# Altium PCB TERMOMETRO-Martinez.PcbDoc
Units mm, origin at the board's own origin, x right, y up, seen from the top; angles counter-clockwise.
Board outline 45 x 70 mm, 2 copper layers (Top Layer, Bottom Layer); 21 components, 17 nets, 61 pads, 0 vias.
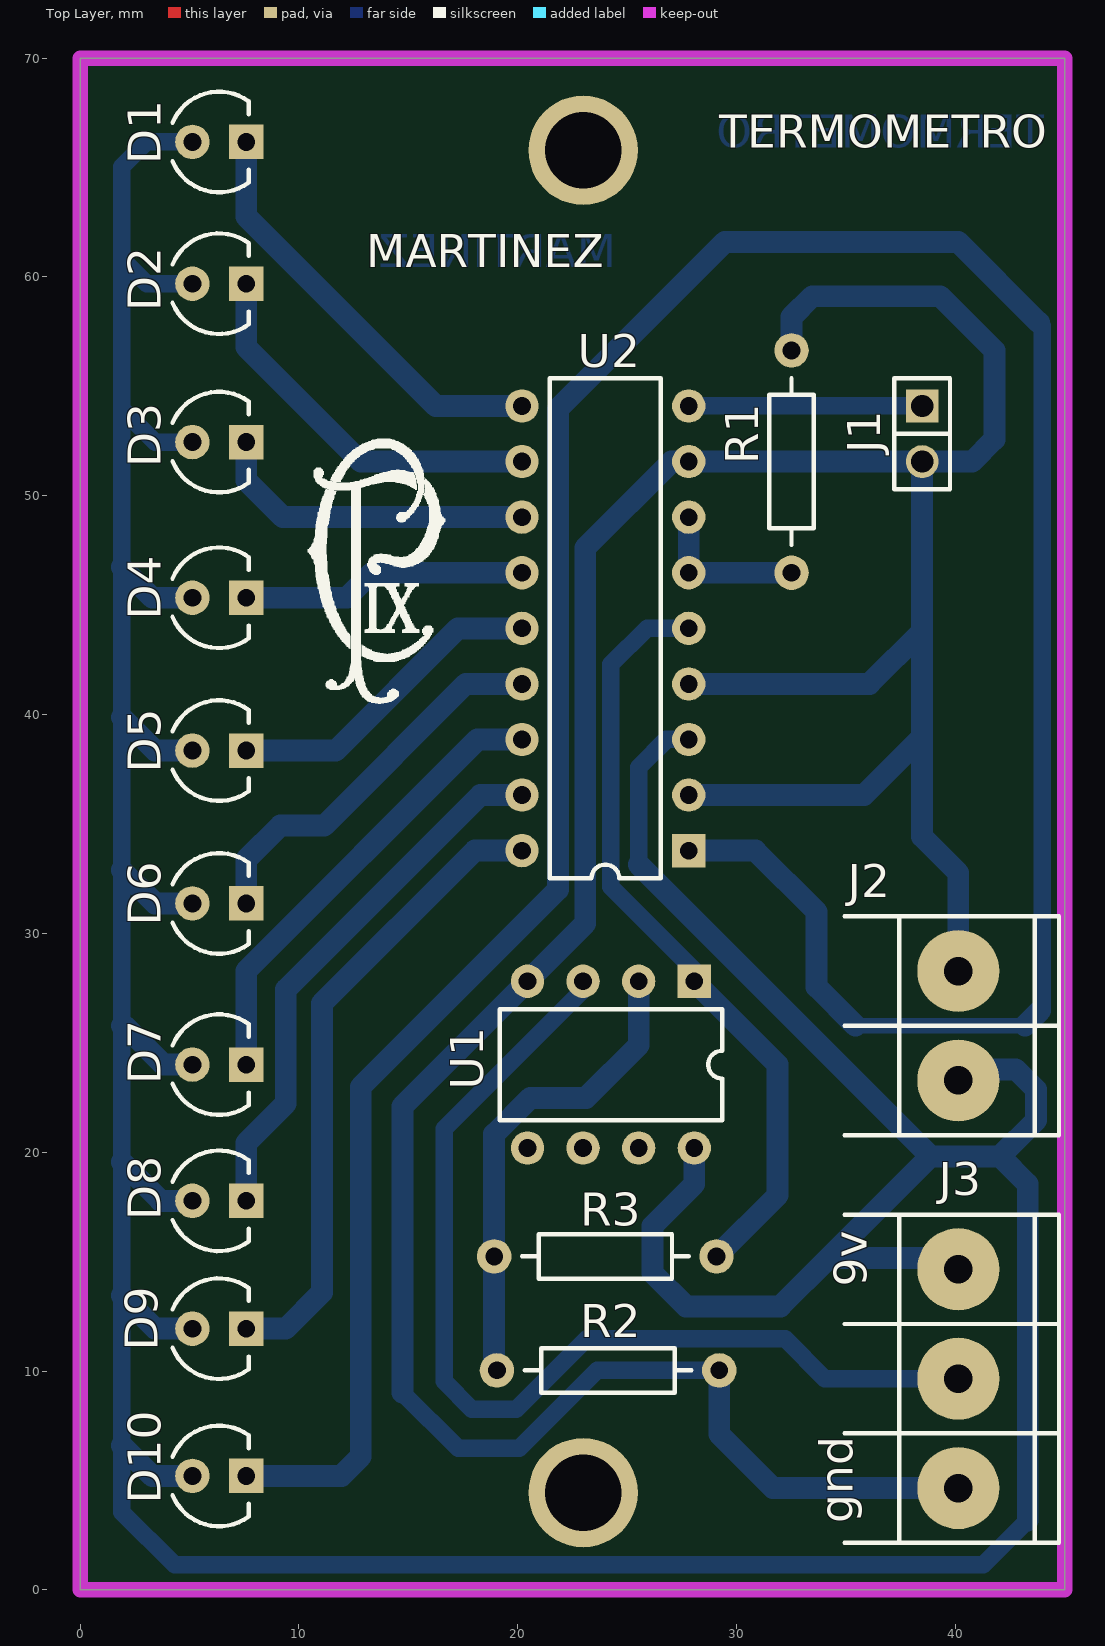
[diagram p0: Top Layer view]
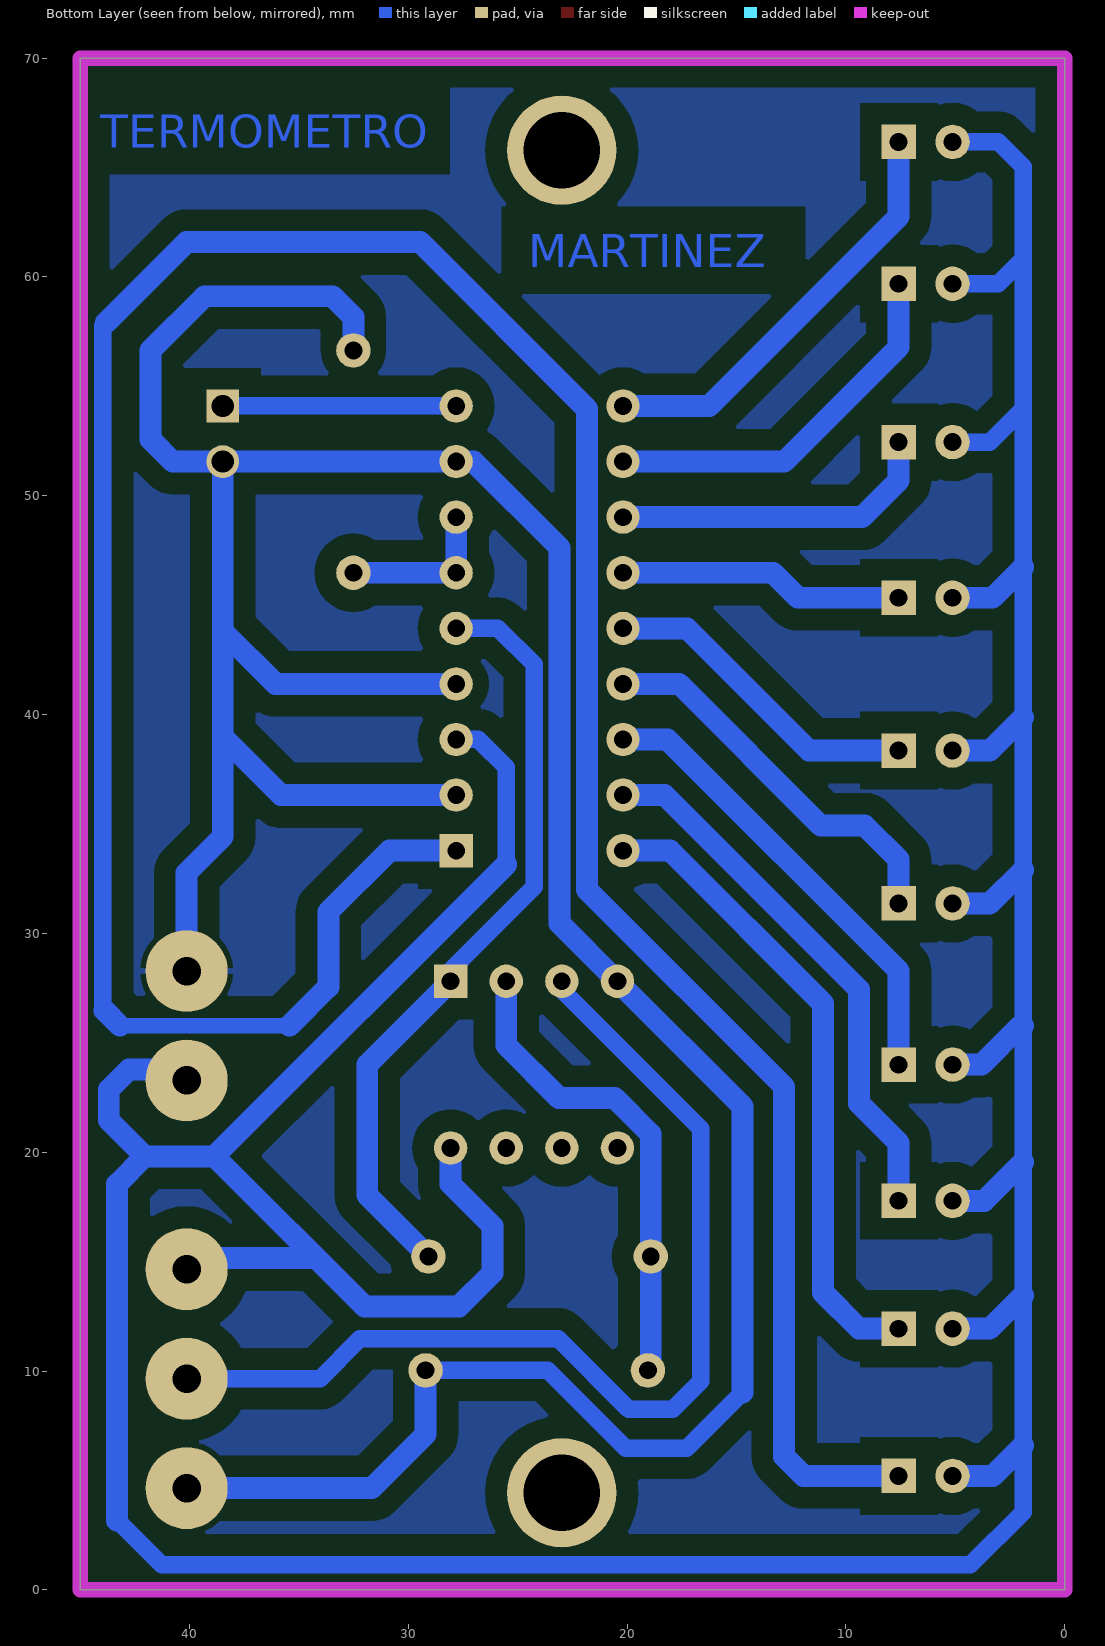
[diagram p1: Bottom Layer view, seen from below]
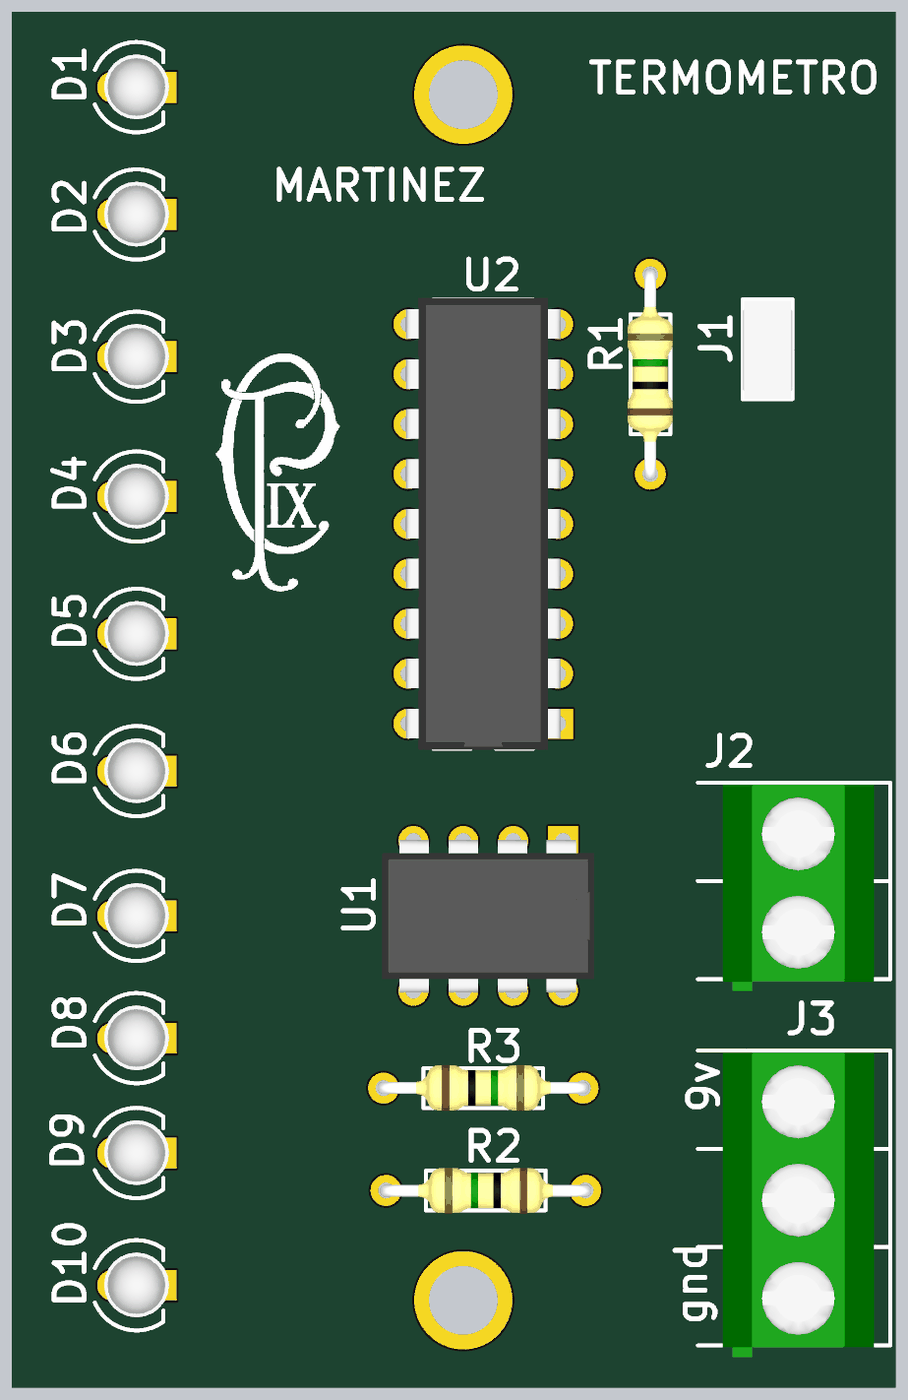
[diagram p2: 3D render of the assembled board from above, using the file's embedded part models]

## Layer stack, top to bottom
Top Solder: solder mask 0.0102, Solder Resist, Dk 3.5
Top Layer: signal copper 0.0356
Dielectric 1: dielectric 0.32, FR-4, Dk 4.8
Bottom Layer: signal copper 0.0356
Bottom Solder: solder mask 0.0102, Solder Resist, Dk 3.5

## Board outline
0,0 0,70 45,70 45,0

## Design rules (kind name [scope] priority, off if disabled: settings)
Clearance "Copper Pour" [InNamedPolygon('Polygon1')] p1: gap=1
Clearance [All] p2: gap=0.254
PolygonConnect [All] p1: connectstyle=Relief reliefconductorwidth=0.254 reliefentries=4 polygonreliefangle="90 Angle" airgapwidth=0.254
RoutingVias [All] p1: holewidth=0.711 width=1.27 viastyle="Through Hole" minholewidth=0.711 minwidth=1.27 maxholewidth=0.711 maxwidth=1.27
SolderMaskExpansion [All] p1: expansion=0.102
Width [All] p1: maxlimit=1 minlimit=0.254 preferedwidth=1 toplayer_maxwidth=0.254 toplayer_prefwidth=0.254 bottomlayer_minwidth=0.7 minimp=50.000000 maximp=50.000000 favimp=50.000000
30 further rules are at their usual default settings.

## Classes and differential pairs
component class TERMOMETRO-3A-SALERNO: D1 D2 D3 D4 D5 D6 D7 D8 D9 D10 J2 R1 R2 R3

## Components (designator, comment, footprint, x,y, rotation, side; value= is the part's Value field where it differs from the comment)
D1 "" LED3 6.35,66.167 r0 top
D2 "" LED3 6.35,59.69 r0 top
D3 "" LED3 6.35,52.451 r0 top
D4 "" LED3 6.35,45.339 r0 top
D5 "" LED3 6.35,38.354 r0 top
D6 "" LED3 6.35,31.369 r0 top
D7 "" LED3 6.35,24.003 r0 top
D8 "" LED3 6.35,17.78 r0 top
D9 "" LED3 6.35,11.938 r0 top
D10 "" LED3 6.35,5.207 r0 top
J1 "" JUMPER2 38.481,52.832 r270 top
J2 "" BORNERA2 40.132,25.781 r180 top
R1 "6.8K" RES400 32.512,46.482 r90 top
R2 "10K" RES400 29.21,10.033 r180 top
R3 "22K" RES400 18.923,15.24 r0 top
"SUJECION ?" "SUJECION" "SUJECION (5.00MM - 3.50MM)" 22.987,65.786 r90 top
"SUJECION ?" "SUJECION" "SUJECION (5.00MM - 3.50MM)" 22.987,4.445 r90 top
U1 "LM358" DIP8 28.067,27.813 r270 top
U2 "IC_DIP18" DIP18 27.813,33.782 r180 top (schematic designator U?)
? "LOGO" "LOGO SILK" 14.097,46.99 r0 top
? "BORNERA 3" BORNERA3 40.132,9.652 r180 top

## Footprints (in the part's own frame and the unit in brackets; to place one, negate y for a bottom-side part, rotate by r counter-clockwise, add the part's x,y. Pads: shape width x height; smd on the part's side, far side on the other; paste and mask are expansions set on the pad)
BORNERA2 [mm] "Bornera con Tornillos 5mm separación"
  round 3.75 hole 1.3: 1(0,2.5) 2(0,-2.5)
  silkscreen extent -4.6,-5 5.2,5, body extent -3.76,-4.89 3.94,5.61, height 10
BORNERA3 [mm] "Bornera con Tornillos 5mm separación"
  round 3.75 hole 1.3: 1(0,5) 2(0,0) 3(0,-5)
  silkscreen extent -4.6,-7.5 5.2,7.5, body extent -3.76,-7.39 3.94,8.11, height 10.05
DIP8 [mil]
  rect 60x60 hole 32: 1(0,0)
  round 60 hole 32: 2(0,-100) 3(0,-200) 4(0,-300) 5(300,-300) 6(300,-200) 7(300,-100) 8(300,0)
  silkscreen extent 50,-350 250,50, body extent -3,-363 303,63, height 177
DIP18 [mil]
  rect 60x60 hole 32: 1(0,0)
  round 60 hole 32: 2(0,-100) 3(0,-200) 4(0,-300) 5(0,-400) 6(0,-500) 7(0,-600) 8(0,-700) 9(0,-800) 10(300,-800) 11(300,-700) 12(300,-600) 13(300,-500) 14(300,-400) 15(300,-300) 16(300,-200) 17(300,-100) 18(300,0)
  silkscreen extent 50,-850 250,50, body extent -5,-853 305,52, height 200
JUMPER2 [mm]
  rect 1.5x1.5 hole 1.016: 1(-1.27,0)
  round 1.5 hole 1.016: 2(1.27,0)
  silkscreen extent -2.54,-1.27 2.54,1.27, body extent -2.46,-1.27 2.54,1.27, height 9.5
LED3 [mil]
  round 62 hole 32: 1(-48,0)
  rect 62x62 hole 32: 2(49,0)
  silkscreen extent -84,-90 54,90, body extent -65,-64 65,65, height 19
"LOGO SILK" [mm]
  silkscreen extent -3.68,-6.48 2.59,5.61
RES400 [mil]
  round 62 hole 32: 1(0,0) 2(400,0)
  silkscreen extent 50,-40 350,40, body extent -12,-45 412,46, height 96
"SUJECION (5.00MM - 3.50MM)" [mm]
  round 5 hole 3.5: 1(0,0)

## Part data
D1 D2 D3 D4 D5 D6 D7 D8 D9 D10: library part LED
J1: library part JUMPER
J2: library part "BORNERA 2"
R1 R2 R3: library part RES

## Nets (pads, with @x,y where several pads share a name; then routed paths per layer and width w, separated by ;. In a path a pad name is that pad's centre, name@x,y a point inside that pad or via, vN(x,y) a via of type N, cw(c..) or ccw(c..) an arc to the next point about the centre after c; other vN are vias at no path point)
+9: ?.3 D1.1 D2.1 D3.1 D4.1 D5.1 D6.1 D7.1 D8.1 D9.1 D10.1 J2.1 U1.8 U2.3 | length 229.2
  Bottom Layer w0.8: D3.1@5.131,52.375 D3.1 3.429,52.451 1.905,53.975 ; D2.1 3.048,59.69 1.905,60.833 ; D1.1 3.048,66.167 1.905,65.024 1.905,60.833 ; 25.527,33.147 25.527,37.592 26.797,38.862 U2.3 ; 43.307,3.175 41.275,1.143 4.318,1.143 1.905,3.556 1.905,6.604 1.905,13.462 1.905,19.558 1.905,25.781 1.905,32.893 1.905,39.878 1.905,46.736 1.905,53.975 ; 1.905,53.975 1.905,60.833
  Bottom Layer w1: 1.905,6.604 3.302,5.207 D10.1 D10.1@5.131,5.03 ; 1.905,13.462 3.429,11.938 D9.1 ; 1.905,19.558 3.683,17.78 D8.1 ; 1.905,25.781 2.032,25.781 3.81,24.003 D7.1 ; 1.905,32.893 3.429,31.369 D6.1 ; 1.905,39.878 3.429,38.354 D5.1 ; 1.905,46.736 3.302,45.339 D4.1 ; 25.527,33.147 38.862,19.812 ; U1.8 28.067,18.542 26.162,16.637 26.162,14.478 27.686,12.954 32.004,12.954 ; ?.3@40.132,15.16 34.21,15.16 32.004,12.954 ; J2.1@40.132,23.789 42.759,23.789 43.688,22.86 43.688,21.463 42.037,19.812 ; 43.307,3.175 43.307,18.542 42.037,19.812 ; 32.004,12.954 38.862,19.812 ; 38.862,19.812 42.037,19.812
GND: ?.1 J1.2 J2.2 R1.2 R2.1 U1.4 U2.2 U2.4 U2.8 | length 157.9
  Bottom Layer w0.8: 14.732,9.017 17.272,6.477 20.066,6.477 23.622,10.033 R2.1
  Bottom Layer w1: 14.732,9.017 14.732,22.098 U1.4 23.087,30.453 23.087,47.625 27.024,51.562 U2.8 J1.2 ; U2.2 35.814,36.322 38.481,38.989 ; U2.4 36.068,41.402 38.481,43.815 ; R2.1 29.21,7.112 31.67,4.652 ?.1 ; R1.2 32.512,58.166 33.465,59.118 39.306,59.118 41.783,56.642 41.783,52.578 40.767,51.562 J1.2 ; J2.2@40.132,28.789 40.132,32.766 38.481,34.417 38.481,38.989 ; 38.481,38.989 38.481,43.815 ; 38.481,43.815 J1.2
Net_2: ?.2 U1.3 | length 47
  Bottom Layer w0.8: U1.3 22.987,27.432 16.637,21.082 16.637,9.525 17.907,8.255 19.939,8.255 23.158,11.474 32.214,11.474 34.036,9.652 ?.2
NetD1_2: D1.2 U2.10 | length 19.6
  Bottom Layer w1: D1.2 7.595,62.763 16.256,54.102 U2.10
NetD2_2: D2.2 U2.11 | length 17.7
  Bottom Layer w1: D2.2 7.595,56.794 12.827,51.562 U2.11
NetD3_2: D3.2 U2.12 | length 15
  Bottom Layer w1: D3.2 7.595,50.698 9.271,49.022 U2.12
NetD4_2: D4.2 U2.13 | length 13.1
  Bottom Layer w1: D4.2 12.192,45.339 13.335,46.482 U2.13
NetD5_2: D5.2 U2.14 | length 14.9
  Bottom Layer w1: D5.2 11.684,38.354 17.272,43.942 U2.14
NetD6_2: D6.2 U2.15 | length 17.9
  Bottom Layer w1: D6.2 7.595,33.376 9.144,34.925 11.151,34.925 17.628,41.402 U2.15
NetD7_2: D7.2 U2.16 | length 21.3
  Bottom Layer w1: D7.2 7.595,28.296 18.161,38.862 U2.16
NetD8_2: D8.2 U2.17 | length 24.9
  Bottom Layer w1: D8.2 7.595,20.422 9.398,22.225 9.398,27.432 18.288,36.322 U2.17
NetD9_2: D9.2 U2.18 | length 29.4
  Bottom Layer w1: D9.2 9.398,11.938 11.049,13.589 11.049,26.797 18.034,33.782 U2.18
NetD10_2: D10.2 U2.1 | length 137
  Bottom Layer w0.7: 35.433,25.781 43.18,25.781
  Bottom Layer w0.8: 43.815,57.912 43.961,57.766 43.961,26.479
  Bottom Layer w1: D10.2 11.938,5.207 12.827,6.096 12.827,22.987 21.833,31.993 21.833,53.964 29.464,61.595 40.132,61.595 43.815,57.912 ; U2.1 30.861,33.782 33.655,30.988 33.655,27.559 35.433,25.781 ; 43.18,25.781 43.878,26.479
NetJ1_1: J1.1 U2.9 | length 10.7
  Bottom Layer w0.8: U2.9 J1.1
NetR1_1: R1.1 U2.6 U2.7 | length 7.2
  Bottom Layer w1: U2.7 U2.6 R1.1
NetR2_2: R2.2 R3.1 U1.2 | length 22.1
  Bottom Layer w0.8: R2.2@18.923,10.16 R2.2
  Bottom Layer w1: R2.2@18.923,10.16 R3.1 18.923,20.828 20.574,22.479 23.114,22.479 25.527,24.892 U1.2
NetR3_2: R3.2 U1.1 U2.5 | length 35.6
  Bottom Layer w0.8: U2.5 25.908,43.942 24.257,42.291 24.257,32.131 28.067,28.321 U1.1
  Bottom Layer w1: U1.1 31.877,24.003 31.877,18.034 R3.2
pads on no net: "SUJECION ?.1" U1.5 U1.6 U1.7

## Polygon pours and split planes (outlines as drawn)
GND on Bottom Layer "polygon1" (solid, pour order 4): 0.418,0.104 45.037,0.104 45.037,70.104 0.037,70.104

## Keep-outs
Keep-Out Layer:
  the board outline again, w0.7

## Other copper
Bottom Layer:
  text "TERMOMETRO" at 44.069,65.913 h1.52
  text "MARTINEZ" at 24.511,60.452 h1.52

## Silkscreen, mask and mechanical layers (free items; w line width, h text height)
Top Overlay:
  text "TERMOMETRO" at 29.21,65.913 h1.52
  text "MARTINEZ" at 13.081,60.452 h1.52
  text "J3" at 39.243,18.034 h1.52
  text "9v" at 35.941,13.843 h1.52 r90
  text "gnd" at 35.306,3.048 h1.52 r90